# Altium PCB 88LM PCB.PcbDoc
Units mil, origin at the board's own origin, x right, y up, seen from the top; angles counter-clockwise.
Board outline 5000 x 5000 mil, 2 copper layers (Top Layer, Bottom Layer); 77 components, 30 nets, 204 pads, 0 vias.
Unrouted connection lines stored in the file: 36.
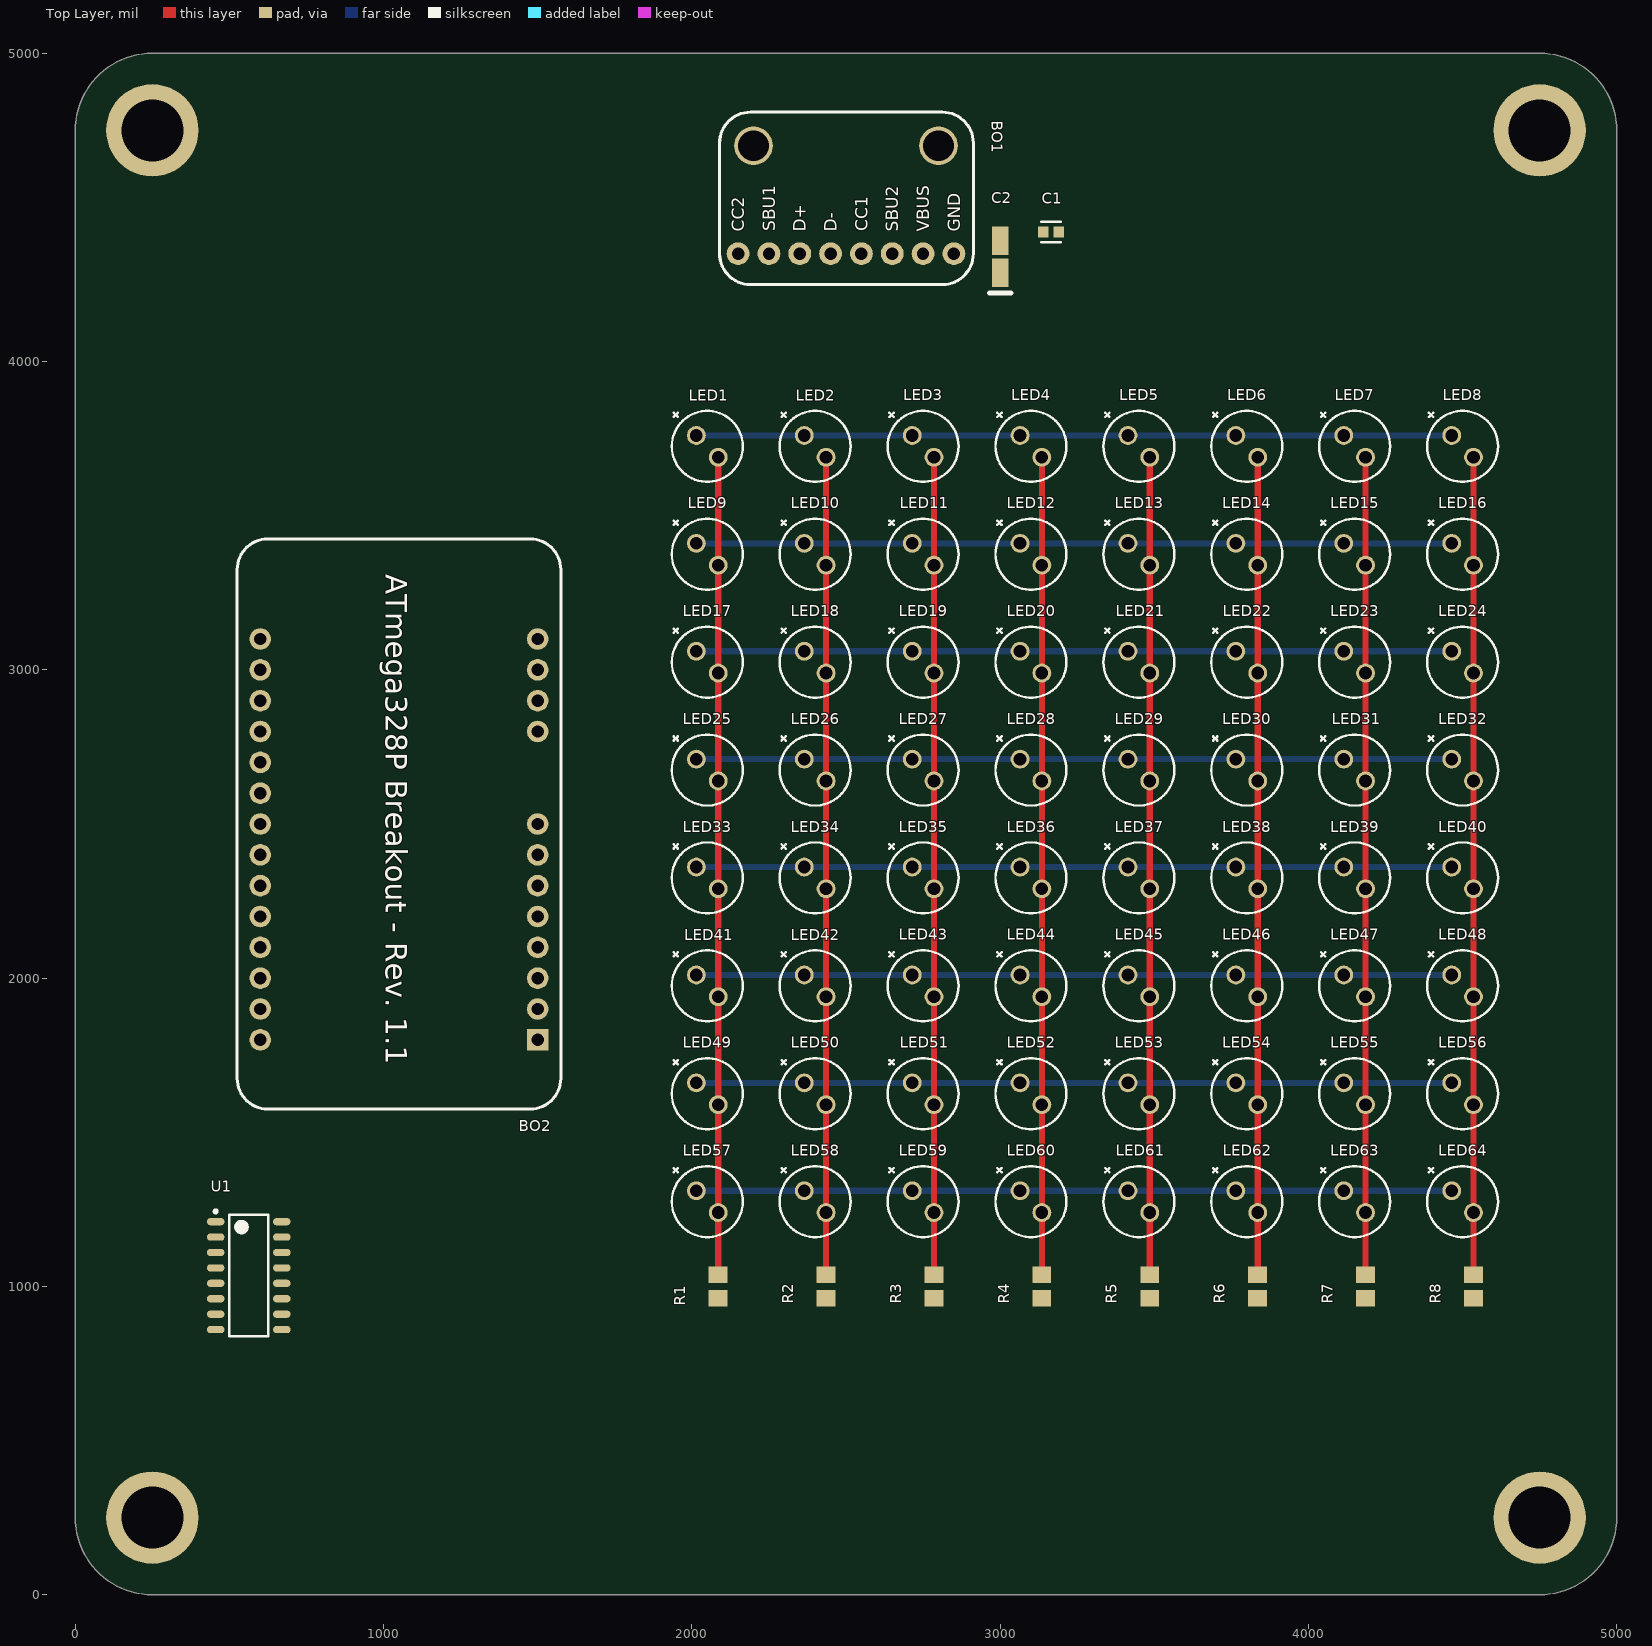
[diagram p0: Top Layer view]
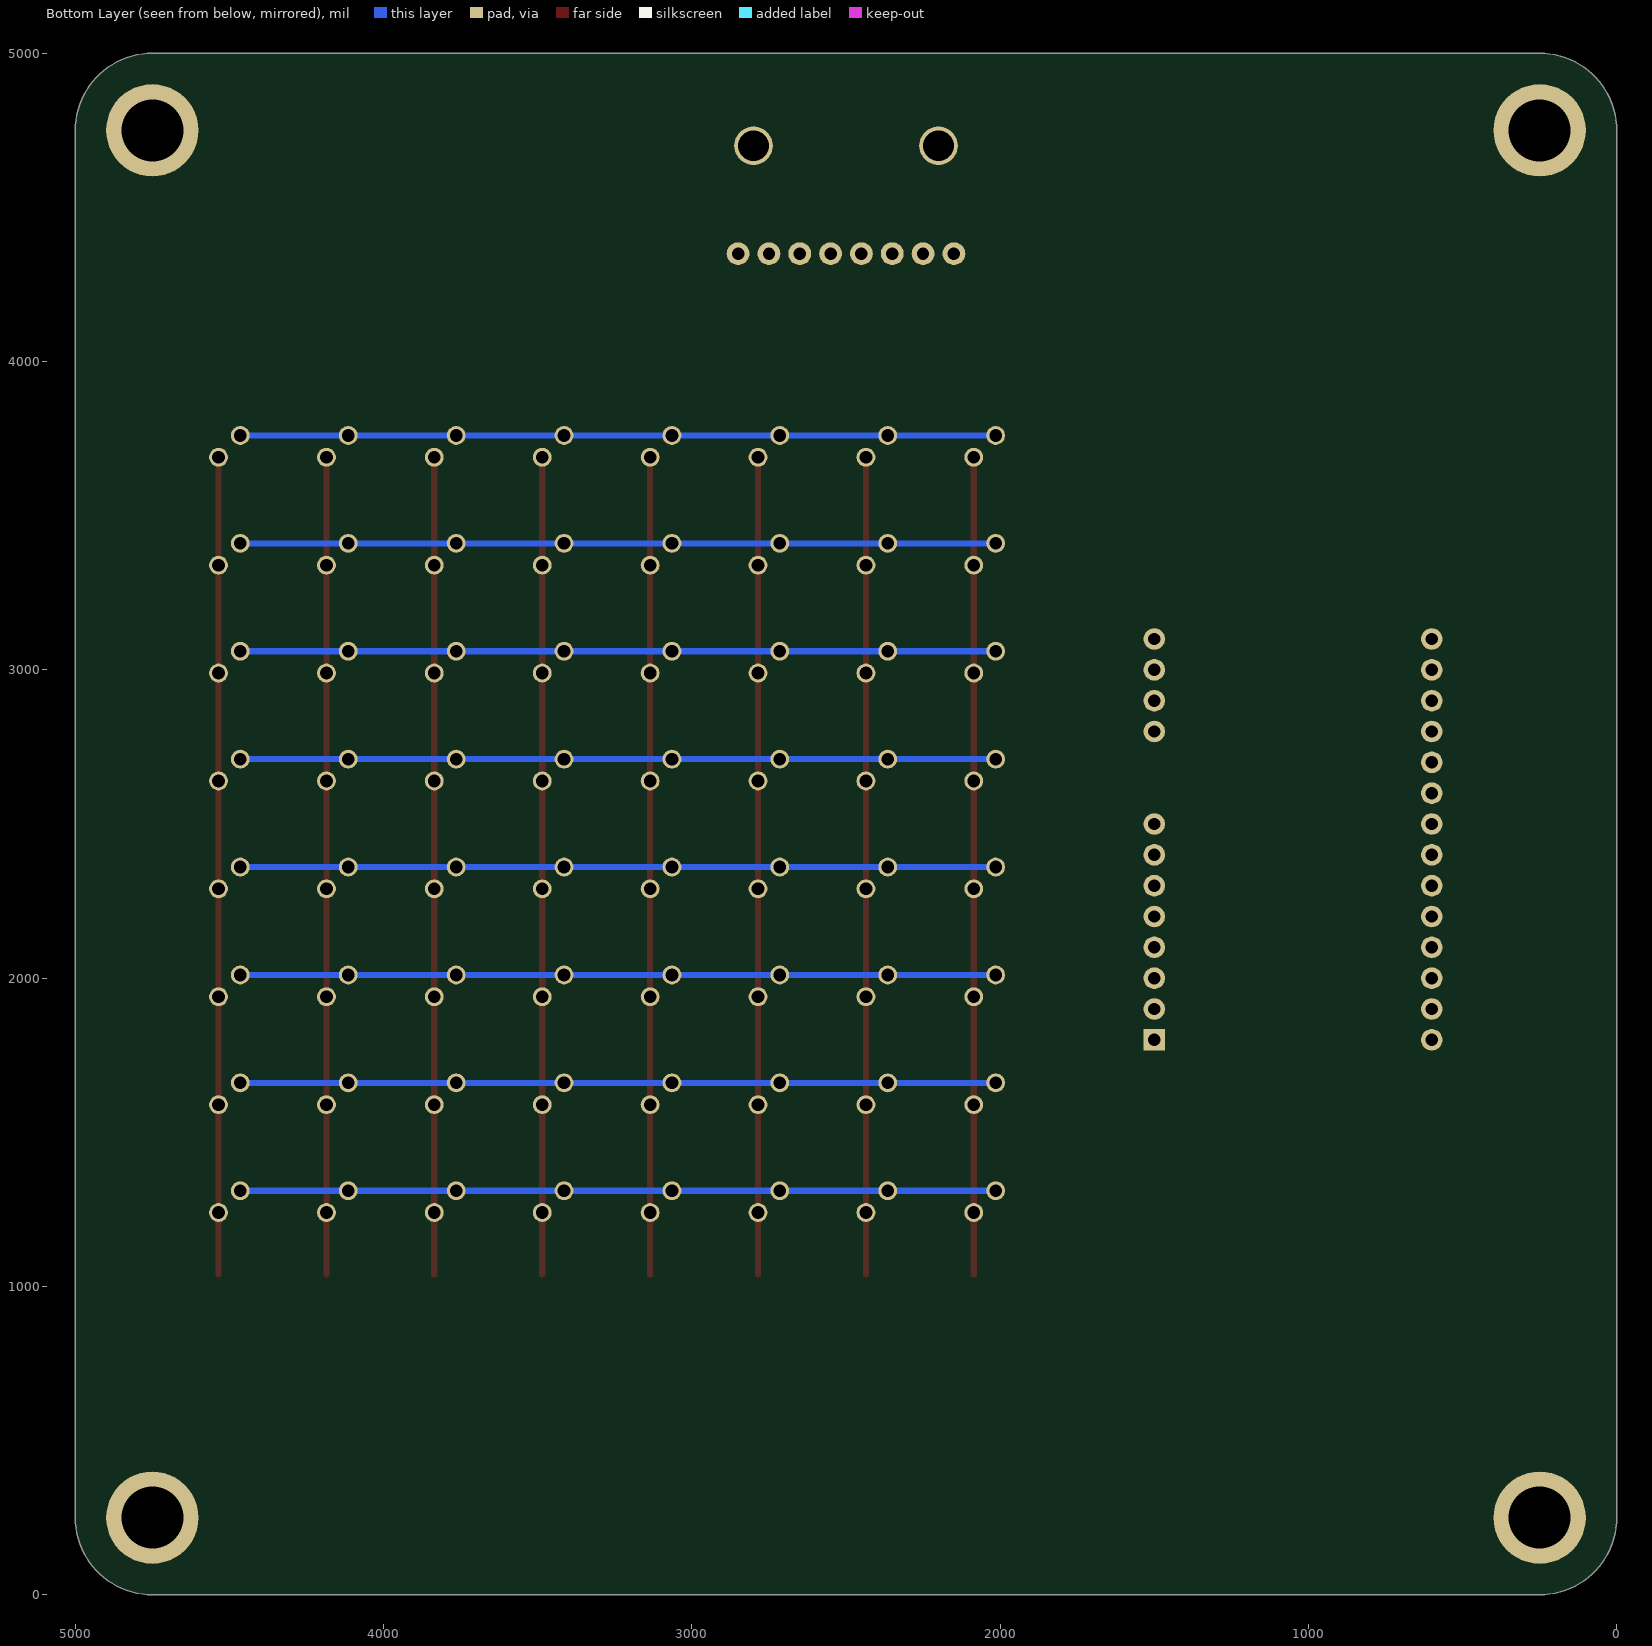
[diagram p1: Bottom Layer view, seen from below]

## Layer stack, top to bottom
Top Solder: solder mask 0.4, Solder Resist, Dk 3.5
Top Layer: signal copper 1.4
Dielectric 1: dielectric 12.6, FR-4, Dk 4.8
Bottom Layer: signal copper 1.4
Bottom Solder: solder mask 0.4, Solder Resist, Dk 3.5

## Board outline
0,250 0,4750 cw(c250,4750) 250,5000 4750,5000 cw(c4750,4750) 5000,4750 5000,250 cw(c4750,250) 4750,0 250,0 cw(c250,250)

## Design rules (kind name [scope] priority, off if disabled: settings)
Clearance [All] p1: gap=10 ignorepadtopadclearanceinfootprint=FALSE except(0: Arc-Hole Track-Hole SMDPad-Hole THPad-Hole Via-Hole Fill-Hole Poly-Hole Region-Hole Text-Hole)
PolygonConnect [All] p1: connectstyle=Relief reliefconductorwidth=10 reliefentries=4 polygonreliefangle="90 Angle" airgapwidth=10
RoutingVias [All] p1: holewidth=28 width=50 viastyle="Through Hole" minholewidth=28 minwidth=50 maxholewidth=28 maxwidth=50
SolderMaskExpansion [All] p1: expansion=4 istentingtop=FALSE
Width [All] p1: maxlimit=20 minlimit=20 preferedwidth=20 minimp=50.000000 maximp=50.000000 favimp=50.000000
30 further rules are at their usual default settings.

## Components (designator, comment, footprint, x,y, rotation, side; value= is the part's Value field where it differs from the comment)
BO1 "Adafruit USB-C Breakout board socket PIN: 4090" "Adafruit USB-C Breakout" 2150,4350 r0 top locked
BO2 "ATmega328P Custom Breakout" 328P-BOB 1500,1800 r180 top locked
C1 "0.1uF" FP-C0603-CJ-MFG 3165,4420 r0 top value=100nF
C2 "10uF" KEMT-A-3216-18-2_M 3000,4340 r90 top
LED1 "HLMP-4740" AVAG-HLMP-4740 2050,3725 r315 top locked
LED2 "HLMP-4740" AVAG-HLMP-4740 2400,3725 r315 top locked
LED3 "HLMP-4740" AVAG-HLMP-4740 2750,3725 r315 top locked
LED4 "HLMP-4740" AVAG-HLMP-4740 3100,3725 r315 top locked
LED5 "HLMP-4740" AVAG-HLMP-4740 3450,3725 r315 top locked
LED6 "HLMP-4740" AVAG-HLMP-4740 3800,3725 r315 top locked
LED7 "HLMP-4740" AVAG-HLMP-4740 4150,3725 r315 top locked
LED8 "HLMP-4740" AVAG-HLMP-4740 4500,3725 r315 top locked
LED9 "HLMP-4740" AVAG-HLMP-4740 2050,3375 r315 top locked
LED10 "HLMP-4740" AVAG-HLMP-4740 2400,3375 r315 top locked
LED11 "HLMP-4740" AVAG-HLMP-4740 2750,3375 r315 top locked
LED12 "HLMP-4740" AVAG-HLMP-4740 3100,3375 r315 top locked
LED13 "HLMP-4740" AVAG-HLMP-4740 3450,3375 r315 top locked
LED14 "HLMP-4740" AVAG-HLMP-4740 3800,3375 r315 top locked
LED15 "HLMP-4740" AVAG-HLMP-4740 4150,3375 r315 top locked
LED16 "HLMP-4740" AVAG-HLMP-4740 4500,3375 r315 top locked
LED17 "HLMP-4740" AVAG-HLMP-4740 2050,3025 r315 top locked
LED18 "HLMP-4740" AVAG-HLMP-4740 2400,3025 r315 top locked
LED19 "HLMP-4740" AVAG-HLMP-4740 2750,3025 r315 top locked
LED20 "HLMP-4740" AVAG-HLMP-4740 3100,3025 r315 top locked
LED21 "HLMP-4740" AVAG-HLMP-4740 3450,3025 r315 top locked
LED22 "HLMP-4740" AVAG-HLMP-4740 3800,3025 r315 top locked
LED23 "HLMP-4740" AVAG-HLMP-4740 4150,3025 r315 top locked
LED24 "HLMP-4740" AVAG-HLMP-4740 4500,3025 r315 top locked
LED25 "HLMP-4740" AVAG-HLMP-4740 2050,2675 r315 top locked
LED26 "HLMP-4740" AVAG-HLMP-4740 2400,2675 r315 top locked
LED27 "HLMP-4740" AVAG-HLMP-4740 2750,2675 r315 top locked
LED28 "HLMP-4740" AVAG-HLMP-4740 3100,2675 r315 top locked
LED29 "HLMP-4740" AVAG-HLMP-4740 3450,2675 r315 top locked
LED30 "HLMP-4740" AVAG-HLMP-4740 3800,2675 r315 top locked
LED31 "HLMP-4740" AVAG-HLMP-4740 4150,2675 r315 top locked
LED32 "HLMP-4740" AVAG-HLMP-4740 4500,2675 r315 top locked
LED33 "HLMP-4740" AVAG-HLMP-4740 2050,2325 r315 top locked
LED34 "HLMP-4740" AVAG-HLMP-4740 2400,2325 r315 top locked
LED35 "HLMP-4740" AVAG-HLMP-4740 2750,2325 r315 top locked
LED36 "HLMP-4740" AVAG-HLMP-4740 3100,2325 r315 top locked
LED37 "HLMP-4740" AVAG-HLMP-4740 3450,2325 r315 top locked
LED38 "HLMP-4740" AVAG-HLMP-4740 3800,2325 r315 top locked
LED39 "HLMP-4740" AVAG-HLMP-4740 4150,2325 r315 top locked
LED40 "HLMP-4740" AVAG-HLMP-4740 4500,2325 r315 top locked
LED41 "HLMP-4740" AVAG-HLMP-4740 2050,1975 r315 top locked
LED42 "HLMP-4740" AVAG-HLMP-4740 2400,1975 r315 top locked
LED43 "HLMP-4740" AVAG-HLMP-4740 2750,1975 r315 top locked
LED44 "HLMP-4740" AVAG-HLMP-4740 3100,1975 r315 top locked
LED45 "HLMP-4740" AVAG-HLMP-4740 3450,1975 r315 top locked
LED46 "HLMP-4740" AVAG-HLMP-4740 3800,1975 r315 top locked
LED47 "HLMP-4740" AVAG-HLMP-4740 4150,1975 r315 top locked
LED48 "HLMP-4740" AVAG-HLMP-4740 4500,1975 r315 top locked
LED49 "HLMP-4740" AVAG-HLMP-4740 2050,1625 r315 top locked
LED50 "HLMP-4740" AVAG-HLMP-4740 2400,1625 r315 top locked
LED51 "HLMP-4740" AVAG-HLMP-4740 2750,1625 r315 top locked
LED52 "HLMP-4740" AVAG-HLMP-4740 3100,1625 r315 top locked
LED53 "HLMP-4740" AVAG-HLMP-4740 3450,1625 r315 top locked
LED54 "HLMP-4740" AVAG-HLMP-4740 3800,1625 r315 top locked
LED55 "HLMP-4740" AVAG-HLMP-4740 4150,1625 r315 top locked
LED56 "HLMP-4740" AVAG-HLMP-4740 4500,1625 r315 top locked
LED57 "HLMP-4740" AVAG-HLMP-4740 2050,1275 r315 top locked
LED58 "HLMP-4740" AVAG-HLMP-4740 2400,1275 r315 top locked
LED59 "HLMP-4740" AVAG-HLMP-4740 2750,1275 r315 top locked
LED60 "HLMP-4740" AVAG-HLMP-4740 3100,1275 r315 top locked
LED61 "HLMP-4740" AVAG-HLMP-4740 3450,1275 r315 top locked
LED62 "HLMP-4740" AVAG-HLMP-4740 3800,1275 r315 top locked
LED63 "HLMP-4740" AVAG-HLMP-4740 4150,1275 r315 top locked
LED64 "HLMP-4740" AVAG-HLMP-4740 4500,1275 r315 top locked
R1 "ERJ-6GEYJ201V" RESC2013X70X40ML20T20 2085,1000 r90 top locked
R2 "ERJ-6GEYJ201V" RESC2013X70X40ML20T20 2435,1000 r90 top locked
R3 "ERJ-6GEYJ201V" RESC2013X70X40ML20T20 2785,1000 r90 top locked
R4 "ERJ-6GEYJ201V" RESC2013X70X40ML20T20 3135,1000 r90 top locked
R5 "ERJ-6GEYJ201V" RESC2013X70X40ML20T20 3485,1000 r90 top locked
R6 "ERJ-6GEYJ201V" RESC2013X70X40ML20T20 3835,1000 r90 top locked
R7 "ERJ-6GEYJ201V" RESC2013X70X40ML20T20 4185,1000 r90 top locked
R8 "ERJ-6GEYJ201V" RESC2013X70X40ML20T20 4535,1000 r90 top locked
U1 "SN74CBT3251D" SOIC127P600X175-16N 562.72,1035 r0 top

## Footprints (in the part's own frame and the unit in brackets; to place one, negate y for a bottom-side part, rotate by r counter-clockwise, add the part's x,y. Pads: shape width x height; smd on the part's side, far side on the other; paste and mask are expansions set on the pad)
328P-BOB [mil]
  rect 70x70 hole 40: 1(0,0)
  round 70 hole 40: 2(0,-100) 3(0,-200) 4(0,-300) 5(0,-400) 6(0,-500) 7(0,-600) 8(0,-700) 9(0,-1000) 10(0,-1100) 11(0,-1200) 12(0,-1300) 13(900,-1300) 14(900,-1200) 15(900,-1100) 16(900,-1000) 17(900,-900) 18(900,-800) 19(900,-700) 20(900,-600) 21(900,-500) 22(900,-400) 23(900,-300) 24(900,-200) 25(900,-100) 26(900,0)
  silkscreen extent -75,-1625 975,225, body extent -75,-1625 975,225, height 444
"Adafruit USB-C Breakout" [mil]
  round 74 hole 40: 1(0,0) 2(100,0) 3(200,0) 4(300,0) 5(400,0) 6(500,0) 7(600,0) 8(700,0)
  round 125 hole 100: MNT1(50,350) MNT2(650,350)
  silkscreen extent -60,-100 763,459
AVAG-HLMP-4740 [mm] "THD, 2-Leads, Dia 5.845mm, Pitch 2.54mm"
  round 1.55 hole 1.05: 1(-1.27,0) 2(1.27,0)
  silkscreen extent -3.92,-2.92 2.92,2.92
FP-C0603-CJ-MFG [mm]
  rect 0.85x0.9 smd paste+0 mask+0: 1(-0.65,0) 2(0.65,0)
  silkscreen extent -0.8,-0.85 0.8,0.85, body extent -1.2,-0.6 1.2,0.6, height 0.25
KEMT-A-3216-18-2_M [mm] "Molded TAN Capacitor, 2-Leads, Body 3.4x1.8mm, IPC Low Density"
  rect 2.35x1.35 smd: 1(-1.325,0) 2(1.325,0)
  silkscreen extent -3,-0.9 -3,0.9, body extent -1.7,-0.9 1.7,0.9, height 1.8
RESC2013X70X40ML20T20 [mm] "Chip Resistor, 2-Leads, Body 2.00x1.25mm, IPC Low Density"
  rect 1.35x1.55 smd: 1(-0.975,0) 2(0.975,0)
  body extent -1.1,-0.72 1.1,0.72, height 0.7
SOIC127P600X175-16N [mm] "SOIC, 16-Leads, Body 9.90x3.90mm, Pitch 1.27mm, IPC Medium Density"
  oval 1.45x0.6 smd: 1(-2.725,4.445) 2(-2.725,3.175) 3(-2.725,1.905) 4(-2.725,0.635) 5(-2.725,-0.635) 6(-2.725,-1.905) 7(-2.725,-3.175) 8(-2.725,-4.445) 9(2.725,-4.445) 10(2.725,-3.175) 11(2.725,-1.905) 12(2.725,-0.635) 13(2.725,0.635) 14(2.725,1.905) 15(2.725,3.175) 16(2.725,4.445)
  silkscreen extent -2.85,-5 1.6,5.42, body extent -2,-5 2,5, height 1.75

## Part data
BO1: library part "Adafruit USB-C Breakout", "https://www.adafruit.com/product/4090", ComponentLink1Description=Adafruit, ComponentLink1URL=https://www.adafruit.com/product/4090
BO2: library part 328P-BOB, "Custom Breakout Board for 328P-PU"
C1: library part CMP-2006-03300-2, "CAP CER 0.1UF 50V X7R 0603", Capacitance=100nF, Manufacturer=Kemet, Manufacturer Part Number=C0603X104K5RACTU, Package=C0603-CJ, Temperature="-55°C to +125°C", Temperature Characteristic=X7R, Temperature Coefficient=15%, Temperature Range High=+125°C, Temperature Range Low=-55°C, Tolerance=10%, Voltage=50V, Automotive=No, Category=Cap, ComponentLink2Description=Datasheet, ComponentLink2URL=https://content.kemet.com/datasheets/KEM_C1013_X7R_FT-CAP_SMD.pdf, Device Class L1="Passive Components", Device Class L2=Capacitors, Device Class L3="Ceramic Capacitors", Digikey Description="CAP CER 0.1UF 50V X7R 0603", Height=0.95mm, Ipc Land Pattern Name=CAPC16080X80, Lead Free=Yes, Material=Ceramic, Mouser Description="Capacitor; Ceramic; Cap 0.1uF; Tol+10%; SMT; Flexible Termination; Vol-Rtg 50V; TR", Octopart=https://octopart.com/c0603x104k5ractu-kemet-9145062, RoHS=TRUE, Voltage Rating=50V
C2: library part CMP-2000-05172-1, "Capacitor, Tantalum, 10 uF, +/- 10%, 10 V, -55 to 125 degC, 2-Pin SMD (1206), RoHS, Tape and Reel", Capacitance=10µF, ESR (Equivalent Series Resistance)=3.8Ohm, Lifetime @ Temp.=2000Hrs@85degC, Manufacturer=Kemet, Manufacturer Size Code=A, Operating Temperature=-55degC~125degC, Package / Case=1206(3216Metric), Package Description="2-Pin Surface Mount Device, Body 3.2 x 1.6 mm", Package Reference=1206, Standard Package=2,000, Tolerance=±10%, Voltage - Rated=10V, Catalog Drawings=T49x,T5xxSeries_A-side1T49x,T5xxSeries_A,B-side2T49x,T5xxSeries_A,SBottom, Category=Capacitors, Datasheet URL=http://www.farnell.com/datasheets/1824869.pdf, Datasheet Version=Apr-14, Family=TantalumCapacitors, Features=GeneralPurpose, Height - Seated (Max)="0.071\"(1.80mm)", Lead Spacing=-, Manufacturer URL=http://www.kemet.com/, Mounting Type=SurfaceMount, Online Catalog=T491Series, Other Names=399-3684-2, Packaging=Tape&Reel(TR), Product Training Modules=CapacitorBasics-TypicalUsesforCapacitorsDeratingGuidelinesforSurfaceMountTantalumCapacitors, Series=T491, Size / Dimension="0.126\"Lx0.063\"W(3.20mmx1.60mm)", Type=Molded
LED1 LED2 LED3 LED4 LED5 LED6 LED7 LED8 LED9 LED10 LED11 LED12 LED13 LED14 LED15 LED16 LED17 LED18 LED19 LED20 LED21 LED22 LED23 LED24 LED25 LED26 LED27 LED28 LED29 LED30 LED31 LED32 LED33 LED34 LED35 LED36 LED37 LED38 LED39 LED40 LED41 LED42 LED43 LED44 LED45 LED46 LED47 LED48 LED49 LED50 LED51 LED52 LED53 LED54 LED55 LED56 LED57 LED58 LED59 LED60 LED61 LED62 LED63 LED64: library part CMP-2000-06413-1, "T-1 3/4 (5 mm) Low Current LED Lamp, Green, 1.9 V, -20 to 100 degC, 2-Pin THD, RoHS, Bulk", Color=Green, Dominant Wavelength/Color Temperature=569nm, Manufacturer=AvagoTechnologies, Package=2T-13/4, Package Description="2-Pin Through Hole Device, Dia 5.845 mm, Pitch 2.54 mm", Category=LEDs, Datasheet URL=http://docs.avagotech.com/docs/AV02-1557EN, Datasheet Version=07/2014, Intensity=2.3mcd, Lens Appearance=ColoredDiffused, Lens Shape Type=Circular, Manufacturer URL=http://www.avagotech.com/, Mounting=ThroughHole, Mounting Orientation=TopMount, Mounting Technology=ThroughHole, Number of LEDs=1, Package Reference=HLMP-4740, Packaging=Bulk, Peak Wavelength=565nm, Pin Count=2, Rad Hard=No, Type=Uni-Color, Viewing Angle=50°
R1 R2 R3 R4 R5 R6 R7 R8: library part CMP-2001-00369-1, Manufacturer=Panasonic, Part Number=ERJ-6GEYJ201V
U1: Supplier Part Number 1=296-6428-5-ND, Supplier 1=Digi-Key

## Free pads (board coordinates)
  round 299.21 hole 200.79: MNT(250,250) MNT(250,4750) MNT(4750,250) MNT(4750,4750)

## Nets (pads, with @x,y where several pads share a name; then routed paths per layer and width w, separated by ;. In a path a pad name is that pad's centre, name@x,y a point inside that pad or via, vN(x,y) a via of type N, cw(c..) or ccw(c..) an arc to the next point about the centre after c; other vN are vias at no path point)
GND: BO1.8 BO1.MNT1 BO1.MNT2 BO2.8 BO2.20 C1.2 C2.2 pad.MNT U1.5 U1.8
NetBO2_2: BO2.2 LED57.1 LED58.1 LED59.1 LED60.1 LED61.1 LED62.1 LED63.1 LED64.1 | length 2450
  Bottom Layer w20: LED57.1 LED58.1 LED59.1 LED60.1 LED61.1 LED62.1 LED63.1 LED64.1
NetBO2_3: BO2.3 LED49.1 LED50.1 LED51.1 LED52.1 LED53.1 LED54.1 LED55.1 LED56.1 | length 2450
  Bottom Layer w20: LED49.1 LED50.1 LED51.1 LED52.1 LED53.1 LED54.1 LED55.1 LED56.1
NetBO2_4: BO2.4 LED41.1 LED42.1 LED43.1 LED44.1 LED45.1 LED46.1 LED47.1 LED48.1 | length 2450
  Bottom Layer w20: LED41.1 LED42.1 LED43.1 LED44.1 LED45.1 LED46.1 LED47.1 LED48.1
NetBO2_5: BO2.5 LED33.1 LED34.1 LED35.1 LED36.1 LED37.1 LED38.1 LED39.1 LED40.1 | length 2450
  Bottom Layer w20: LED33.1 LED34.1 LED35.1 LED36.1 LED37.1 LED38.1 LED39.1 LED40.1
NetBO2_6: BO2.6 LED25.1 LED26.1 LED27.1 LED28.1 LED29.1 LED30.1 LED31.1 LED32.1 | length 2450
  Bottom Layer w20: LED25.1 LED26.1 LED27.1 LED28.1 LED29.1 LED30.1 LED31.1 LED32.1
NetBO2_9: BO2.9 LED17.1 LED18.1 LED19.1 LED20.1 LED21.1 LED22.1 LED23.1 LED24.1 | length 2450
  Bottom Layer w20: LED17.1 LED18.1 LED19.1 LED20.1 LED21.1 LED22.1 LED23.1 LED24.1
NetBO2_10: BO2.10 LED9.1 LED10.1 LED11.1 LED12.1 LED13.1 LED14.1 LED15.1 LED16.1 | length 2450
  Bottom Layer w20: LED9.1 LED10.1 LED11.1 LED12.1 LED13.1 LED14.1 LED15.1 LED16.1
NetBO2_11: BO2.11 LED1.1 LED2.1 LED3.1 LED4.1 LED5.1 LED6.1 LED7.1 LED8.1 | length 2450
  Bottom Layer w20: LED1.1 LED2.1 LED3.1 LED4.1 LED5.1 LED6.1 LED7.1 LED8.1
NetBO2_12: BO2.12 U1.11
NetBO2_13: BO2.13 U1.10
NetBO2_14: BO2.14 U1.9
NetBO2_21: BO2.21
NetLED1_2: LED1.2 LED9.2 LED17.2 LED25.2 LED33.2 LED41.2 LED49.2 LED57.2 R1.2 | length 2651.4
  Top Layer w20: R1.2 2085.36,1038.74 LED57.2 LED49.2 LED41.2 LED33.2 LED25.2 LED17.2 LED9.2 LED1.2
NetLED2_2: LED2.2 LED10.2 LED18.2 LED26.2 LED34.2 LED42.2 LED50.2 LED58.2 R2.2 | length 2651.4
  Top Layer w20: R2.2 2435.36,1038.74 LED58.2 LED50.2 LED42.2 LED34.2 LED26.2 LED18.2 LED10.2 LED2.2
NetLED3_2: LED3.2 LED11.2 LED19.2 LED27.2 LED35.2 LED43.2 LED51.2 LED59.2 R3.2 | length 2651.4
  Top Layer w20: R3.2 2785.36,1038.74 LED59.2 LED51.2 LED43.2 LED35.2 LED27.2 LED19.2 LED11.2 LED3.2
NetLED4_2: LED4.2 LED12.2 LED20.2 LED28.2 LED36.2 LED44.2 LED52.2 LED60.2 R4.2 | length 2651.4
  Top Layer w20: R4.2 3135.36,1038.74 LED60.2 LED52.2 LED44.2 LED36.2 LED28.2 LED20.2 LED12.2 LED4.2
NetLED5_2: LED5.2 LED13.2 LED21.2 LED29.2 LED37.2 LED45.2 LED53.2 LED61.2 R5.2 | length 2651.4
  Top Layer w20: R5.2 3485.36,1038.74 LED61.2 LED53.2 LED45.2 LED37.2 LED29.2 LED21.2 LED13.2 LED5.2
NetLED6_2: LED6.2 LED14.2 LED22.2 LED30.2 LED38.2 LED46.2 LED54.2 LED62.2 R6.2 | length 2651.4
  Top Layer w20: R6.2 3835.36,1038.74 LED62.2 LED54.2 LED46.2 LED38.2 LED30.2 LED22.2 LED14.2 LED6.2
NetLED7_2: LED7.2 LED15.2 LED23.2 LED31.2 LED39.2 LED47.2 LED55.2 LED63.2 R7.2 | length 2651.4
  Top Layer w20: R7.2 4185.36,1038.74 LED63.2 LED55.2 LED47.2 LED39.2 LED31.2 LED23.2 LED15.2 LED7.2
NetLED8_2: LED8.2 LED16.2 LED24.2 LED32.2 LED40.2 LED48.2 LED56.2 LED64.2 R8.2 | length 2651.4
  Top Layer w20: R8.2 4535.36,1038.74 LED64.2 LED56.2 LED48.2 LED40.2 LED32.2 LED24.2 LED16.2 LED8.2
NetR1_1: R1.1 U1.4
NetR2_1: R2.1 U1.3
NetR3_1: R3.1 U1.2
NetR4_1: R4.1 U1.1
NetR5_1: R5.1 U1.15
NetR6_1: R6.1 U1.14
NetR7_1: R7.1 U1.13
NetR8_1: R8.1 U1.12
VCC: BO1.7 BO2.7 BO2.18 C1.1 C2.1 U1.16
pads on no net: BO1.1 BO1.2 BO1.3 BO1.4 BO1.5 BO1.6 BO2.1 BO2.15 BO2.16 BO2.17 BO2.19 BO2.22 BO2.23 BO2.24 BO2.25 BO2.26 U1.6 U1.7

## Silkscreen, mask and mechanical layers (free items; w line width, h text height)
Mechanical 1:
  the board outline again, w7

## Text inside footprints (layer, text, board x,y; h text height)
BO1: Top Overlay "D+" at 2369.99,4421.68 h40 r90; Top Overlay "CC1" at 2569.99,4423.35 h40 r90; Top Overlay "SBU2" at 2669.99,4421.69 h40 r90; Top Overlay "GND" at 2869.99,4421.68 h40 r90; Top Overlay "CC2" at 2169.99,4421.68 h40 r90; Top Overlay "D-" at 2469.99,4421.68 h40 r90; Top Overlay "SBU1" at 2269.99,4423.35 h40 r90; Top Overlay "VBUS" at 2769.99,4421.69 h40 r90
BO2: Top Overlay "ATmega328P Breakout - Rev. 1.1" at 1006.84,3309.82 h70 r270